# EAGLE board royer_1kw (EAGLE 7.6.0)
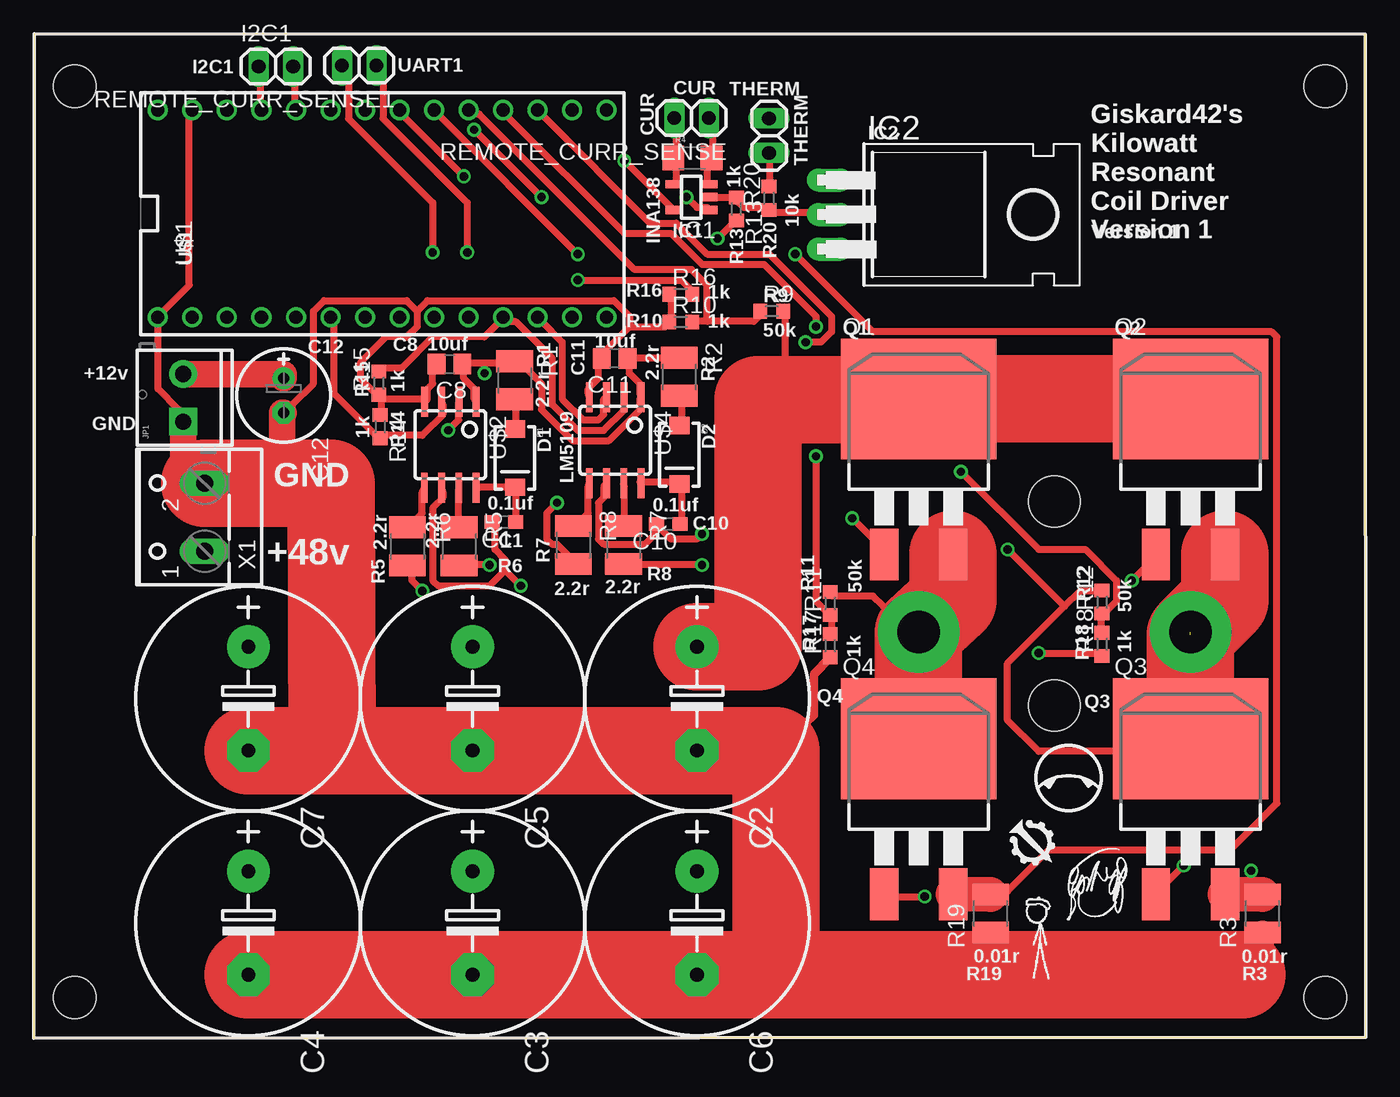
[diagram p0: board, top side]
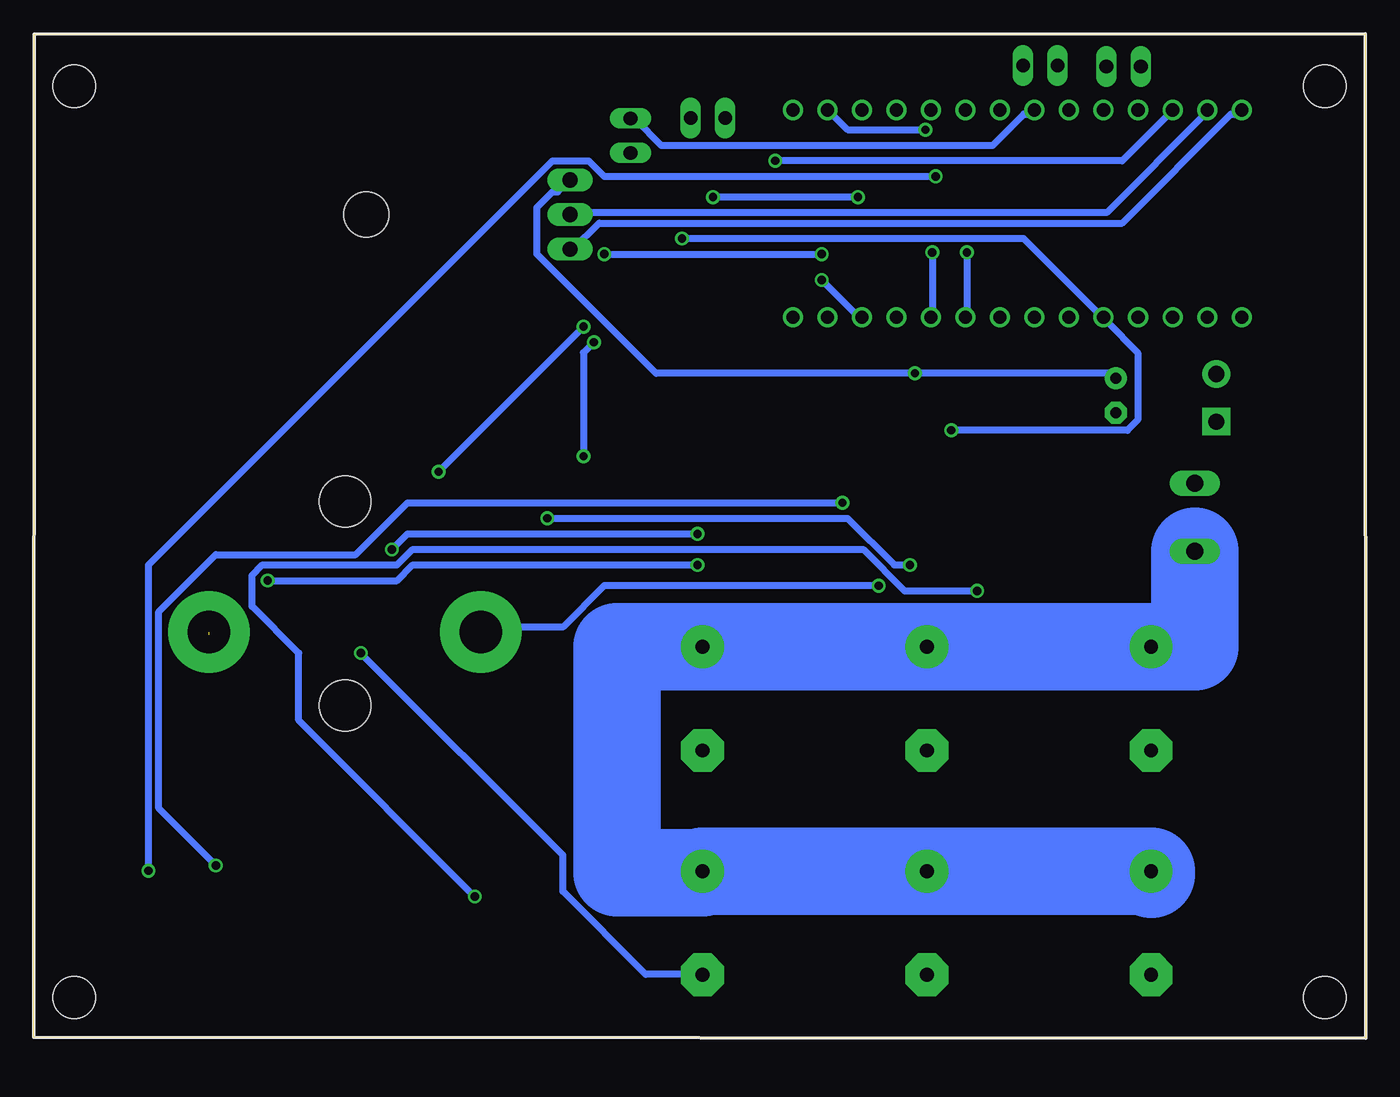
[diagram p1: board, bottom side, seen from below]

Size 97.95 x 73.85 mm. Coordinates in mm from the lower left corner, seen from the top.
Outline: 0,0 97.95,0.07 97.94,73.82 0.01,73.85 0,0
Copper layers (1*16): Top 0.035mm / dielectric 1.5mm / Bottom 0.035mm
Design rules "default *": minimum track width 10mil, minimum drill 24mil, track to track 10mil, track to pad 8mil, pad to pad 8mil, via to via 8mil, smd to smd 8mil, copper to edge 40mil, drill to drill 8mil, minimum pad ring 10mil, minimum via ring 8mil, stop-mask expansion 4mil, vias tented up to drill 0mil, thermal gap 10mil
Net classes: 0 default: width 0.508 mm
Holes 3.78 mm at 75.07,24.47 75.07,39.47
Holes 3.11 mm at 2.99,3.01 2.99,70.01 94.99,70.01 94.99,3.01

## Footprints (pad centres in the part's own frame; a part is rotated, then mirrored left to right if it is on the bottom)
C0603 = smd 1.1 x 1: 1 -0.85,0; 2 0.85,0
E7,5-16 = drill 1.016 pad 3.15: + -3.81,0 | drill 1.016 pad 3.15 octagon: - 3.81,0
C0805 = smd 1.3 x 1.5: 1 -0.95,0; 2 0.95,0
E2,5-7 = drill 0.813 pad 1.6: + -1.27,0 | drill 0.813 pad 1.6 octagon: - 1.27,0
SMA-DIODE = smd 1.27 x 1.47: A -2.15,0; C 2.15,0
1X02 = drill 1.016 long: 1 -1.27,0; 2 1.27,0
SOT23-5 = smd 0.6 x 1.2: 1 -0.95,-1.306; 2 0,-1.306; 3 0.95,-1.306; 4 0.95,1.306; 5 -0.95,1.306
TO220H = drill 1.118 long: 1 -2.54,-10.16; 2 0,-10.16; 3 2.54,-10.16 | hole 3.302: 0,4.826
SCREWTERMINAL-3.5MM-2 = drill 1.2 pad 2.032 square: 1 0,0 | drill 1.2 pad 2.032: 2 3.5,0
D2PACK = smd 2.083 x 3.81: 1 -2.54,-8.89; 3 2.54,-8.89 | smd 11.43 x 8.89: 2 0,2.54
R1210 = smd 1.6 x 2.7: 1 -1.4,0; 2 1.4,0
R3225 = smd 1.6 x 2.7: 1 -1.4,0; 2 1.4,0
1206 = smd 1.6 x 1.8: 1 -1.4,0; 2 1.4,0
R0603 = smd 1 x 1.1: 1 -0.85,0; 2 0.85,0
TEENSY_3.0-3.2&LC_DIL = drill 0.965: 0 -7.62,13.97; 1 -7.62,11.43; 2 -7.62,8.89; 3 -7.62,6.35; 3.3V 7.62,11.43; 4 -7.62,3.81; 5 -7.62,1.27; 6 -7.62,-1.27; 7 -7.62,-3.81; 8 -7.62,-6.35; 9 -7.62,-8.89; 10 -7.62,-11.43; 11 -7.62,-13.97; 12 -7.62,-16.51; 13 7.62,-16.51; 14/A0 7.62,-13.97; 15/A1 7.62,-11.43; 16/A2 7.62,-8.89; 17/A3 7.62,-6.35; 18/A4 7.62,-3.81; 19/A5 7.62,-1.27; 20/A6 7.62,1.27; 21/A7 7.62,3.81; 22/A8 7.62,6.35; 23/A9 7.62,8.89; AGND 7.62,13.97; GND -7.62,16.51; VIN 7.62,16.51
SOIC8 = smd 0.5 x 2.2: 1 -1.905,-3.154; 2 -0.645,-3.154; 3 0.625,-3.154; 4 1.895,-3.154; 5 1.905,3.154; 6 0.635,3.154; 7 -0.635,3.154; 8 -1.905,3.154
W237-102 = drill 1.245 long: 1 -2.5,-1.27; 2 2.5,-1.27

## Placement (x,y rotation side)
C1  0.1uf  [C0603]  34.56,37.96 180 top
C2  [E7,5-16]  48.77,24.97 270 top
C3  [E7,5-16]  32.27,8.47 270 top
C4  [E7,5-16]  15.77,8.47 270 top
C5  [E7,5-16]  32.27,24.97 270 top
C6  [E7,5-16]  48.77,8.47 270 top
C7  [E7,5-16]  15.77,24.97 270 top
C8  10uf  [C0805]  30.57,49.57 180 top
C10  0.1uf  [C0603]  46.66,37.83 180 top
C11  10uf  [C0805]  42.71,49.99 180 top
C12  [E2,5-7]  18.37,47.27 270 top
D1  [SMA-DIODE]  35.38,42.66 270 top
D2  [SMA-DIODE]  47.48,42.91 270 top
I2C1  UART1  [1X02]  17.79,71.45 0 top
IC1  INA138  [SOT23-5]  48.36,61.86 90 top
IC2  7805T  [TO220H]  68.67,60.57 270 top
JP1  [SCREWTERMINAL-3.5MM-2]  10.98,45.34 90 top
Q1  IRF3704S  [D2PACK]  65.07,44.47 0 top
Q2  IRF3704S  [D2PACK]  85.07,44.47 0 top
Q3  IRF3704S  [D2PACK]  85.07,19.47 0 top
Q4  IRF3704S  [D2PACK]  65.07,19.47 0 top
R1  2.2r  [R1210]  35.36,48.39 270 top
R2  2.2r  [R1210]  47.46,48.64 270 top
R3  0.01r  [R3225]  90.37,9.17 90 top
R4  [1206]  48.43,64.73 0 top
R5  2.2r  [R1210]  31.27,36.17 270 top
R6  2.2r  [R1210]  27.47,36.17 270 top
R7  2.2r  [R1210]  43.37,36.27 270 top
R8  2.2r  [R1210]  39.67,36.27 270 top
R9  50k  [R0603]  54.27,53.47 0 top
R10  1k  [R0603]  47.57,52.67 0 top
R11  50k  [R0603]  58.57,31.97 90 top
R12  50k  [R0603]  78.57,32.07 90 top
R13  1k  [R0603]  51.67,60.97 270 top
R14  1k  [R0603]  25.47,44.97 270 top
R15  1k  [R0603]  25.37,48.17 90 top
R16  1k  [R0603]  47.58,54.72 0 top
R17  1k  [R0603]  58.57,28.87 90 top
R18  1k  [R0603]  78.57,28.97 90 top
R19  0.01r  [R3225]  70.37,9.17 90 top
R20  10k  [R0603]  54.07,61.77 90 top
REMOTE_CURR_SENSE  [1X02]  48.37,67.67 180 top
REMOTE_CURR_SENSE1  UART1  [1X02]  23.92,71.53 180 top
THERMISTOR  [1X02]  54.07,66.37 270 top
U$1  TEENSY_LC_DIL  [TEENSY_3.0-3.2&LC_DIL]  25.62,60.64 90 top
U$2  LM5109  [SOIC8]  30.62,43.65 180 top
U$4  LM5109  [SOIC8]  42.75,43.97 180 top
X1  [W237-102]  11.29,38.32 90 top

## Library data of the parts
C1-C8 C10-C12 R1-R3 R5-R20 = rcl
D1 D2 = SparkFun-DiscreteSemi
I2C1 REMOTE_CURR_SENSE REMOTE_CURR_SENSE1 THERMISTOR = pinhead
IC1 = burr-brown; MF: TEXAS INSTRUMENTS; MPN: INA138NA/250; OC_FARNELL: 1564888; OC_NEWARK: 80K5906
IC2 = linear
JP1 = SparkFun-Connectors; PROD_ID: CONN-08399
Q1-Q4 = transistor-power
R4 = SparkFun-Resistors
U$1 = Teensy_3_and_LC_Series_Boards_v1.4
U$2 U$4 = TheLibrary
X1 = con-wago-500; MPN: 237-102; OC_FARNELL: unknown; OC_NEWARK: 70K9898

## Nets
3V3: IC1.5 U$1.3.3V
5V: IC2.3 U$1.VIN
12V: C8.1 C11.1 C12.+ IC2.1 JP1.2 R1.1 R2.1 U$2.1 U$4.1
48V: C2.+ C3.+ C4.+ C5.+ C6.+ C7.+ Q1.2 Q2.2 R9.2 X1.1
48V_SENSE: R9.1 R10.2 U$1.17/A3
A_HI: R13.2 U$1.3 U$2.2
A_LO: R14.2 U$1.4 U$2.3
A_PHASE: C1.2 Q1.3 Q4.2 R11.2 U$2.6
A_PHASE_CURRENT: Q4.3 R19.2 U$1.18/A4
A_PHASE_V: R11.1 R17.2 U$1.15/A1
B_HI: R15.2 U$1.9 U$4.2
B_LO: R16.2 U$1.10 U$4.3
B_PHASE: C10.2 Q2.3 Q3.2 R12.2 U$4.6
B_PHASE_CURRENT: Q3.3 R3.2 U$1.19/A5
B_PHASE_V: R12.1 R18.2 U$1.16/A2
GND: C2.- C3.- C4.- C5.- C6.- C7.- C8.2 C11.2 C12.- IC1.2 IC2.2 JP1.1 R3.1 R10.1 R13.1 R14.1 R15.1 R16.1 R17.1 R18.1 R19.1 R20.1 U$1.AGND U$1.GND U$2.4 U$4.4 X1.2
N$1: R7.1 U$4.7
N$2: R8.1 U$4.5
N$3: Q1.1 R5.2
N$4: Q4.1 R6.2
N$5: D1.A R1.2
N$6: C1.1 D1.C U$2.8
N$7: IC1.3 R4.2 REMOTE_CURR_SENSE.1
N$8: Q2.1 R7.2
N$9: Q3.1 R8.2
N$10: D2.A R2.2
N$11: C10.1 D2.C U$4.8
N$12: IC1.4 R4.1 REMOTE_CURR_SENSE.2
N$13: R20.2 THERMISTOR.2
N$15: R5.1 U$2.7
N$16: R6.1 U$2.5
N$17: REMOTE_CURR_SENSE1.1 U$1.8
N$18: REMOTE_CURR_SENSE1.2 U$1.7
N$19: I2C1.1 U$1.23/A9
N$20: I2C1.2 U$1.22/A8
REMOTE_CURR_SENSE: IC1.1 U$1.14/A0
THERM: THERMISTOR.1 U$1.20/A6

## Tracks (layer width: path | path; a pad name or v marks a point on that pad's centre or on a via)
3V3  (via drill 0.61)
  Top 0.508: v43.43,64.52 46.85,61.09 IC1.5
  Bottom 0.508: v43.43,64.52 17.9,64.52 14.47,67.95 U$1.3.3V
5V
  Bottom 0.508: U$1.VIN 9.14,67.95 9.9,67.95 17.9,59.95 56.38,59.95 58.28,58.04 IC2.3
12V  (via drill 0.61)
  Top 0.508: R2.1 47.24,50.04 43.81,50.04 C11.1 43.81,49.66 43.81,48.9 44.57,48.14 44.57,47.37 U$4.1 44.57,46.99 44.57,46.23 42.28,43.95 39.62,43.95 37.33,46.23 37.33,48.14 35.42,50.04 R1.1 35.04,49.66 33.14,49.66 | U$2.1 32.38,46.99 32.38,47.76 31.61,48.52 31.61,49.28 C8.1 31.61,49.66 33.14,49.66 | v33.14,48.9 33.14,49.66
  Top 1.93: JP1.2 18.37,48.84 C12.+
  Bottom 0.508: IC2.1 58.67,63 59.43,62.23 59.81,62.23 60.95,61.09 60.95,57.66 52.19,48.9 v33.14,48.9 18.66,48.9 C12.+
48V
  Top 0.508: R9.2 55.24,53.09 55.24,46.97
  Top 6.452: C2.+ 53.27,28.78 53.27,46.97 55.24,46.97 65.03,46.97 Q1.2 Q2.2
  Bottom 6.452: 15.77,12.07 C4.+ C3.+ C6.+ 48.77,12.17 55.07,12.17 55.07,28.78 C2.+ C5.+ C7.+ 12.56,28.78 X1.1
48V_SENSE
  Top 0.508: 49.52,52.71 52.95,52.71 53.33,53.09 R9.1 | 49.52,52.71 48.76,52.71 R10.2 | 49.52,52.71 49.52,55.38 48.38,56.52 44.19,56.52 32.76,67.95 32,67.95 U$1.17/A3
A_HI  (via drill 0.61)
  Top 0.508: v50.28,58.8 51.43,59.95 R13.2 | v30.47,44.71 31.23,45.47 31.23,46.61 U$2.2
  Bottom 0.508: v50.28,58.8 25.14,58.8 19.42,53.09 U$1.3 19.04,52.71 16.76,50.42 16.76,45.47 17.52,44.71 v30.47,44.71
A_LO
  Top 0.508: U$2.3 30.09,46.61 30.09,45.85 28.57,44.33 25.52,44.33 R14.2 25.14,44.33 22.09,47.37 22.09,52.71 U$1.4
A_PHASE  (via drill 0.61, 3.11 pad 6)
  Top 0.508: R11.2 58.67,32.52 61.71,32.52 62.48,31.75 v65.07,29.87 | 34.66,34.42 34.66,35.18 33.9,35.94 33.9,37.85 C1.2 | 34.66,34.42 33.52,33.28 29.71,33.28 29.33,33.66 29.33,38.99 30.09,39.75 30.09,40.14 U$2.6 | 34.66,34.42 v35.81,33.28
  Top 6.452: Q1.3 67.61,32.21 v65.07,29.87 Q4.2
  Bottom 0.508: v35.81,33.28 56,33.28 59.05,30.23 64.76,30.23 v65.07,29.87
A_PHASE_CURRENT  (via drill 0.61)
  Top 0.508: v40,57.66 29.71,67.95 U$1.18/A4 | v56,57.66 61.71,51.95 91.05,51.95 91.43,51.57 91.43,17.28 88,13.85 74.67,13.85 71.62,10.8 R19.2
  Top 2.54: Q4.3 R19.2
  Bottom 0.508: v56,57.66 v40,57.66
A_PHASE_V  (via drill 0.61)
  Top 0.508: R17.2 58.67,29.85 58.67,30.99 R11.1 58.28,31.37 57.52,32.13 v57.52,42.8 | v56.76,51.18 57.9,51.18 58.67,51.95 58.67,53.09 54.09,57.66 49.52,57.66 47.24,59.95 45.33,59.95 37.33,67.95 U$1.15/A1
  Bottom 0.508: v57.52,42.8 57.52,50.42 v56.76,51.18
B_HI
  Top 0.508: R15.2 25.52,49.28 27.04,49.28 29.33,51.57 33.14,51.57 34.28,52.71 U$1.9 34.66,52.71 35.42,52.71 38.09,50.04 38.09,46.61 40,44.71 41.9,44.71 43.43,46.23 43.43,46.99 U$4.2
B_LO  (via drill 0.61)
  Top 0.508: v40,55.76 47.62,55.76 48.38,54.99 R16.2 | U$4.3 41.9,46.99 41.9,45.85 41.52,45.47 40.38,45.47 38.85,46.99 38.85,51.18 37.33,52.71 U$1.10
  Bottom 0.508: v40,55.76 37.33,53.09 U$1.10
B_PHASE  (via drill 0.61, 3.11 pad 6)  (1 unrouted)
  Top 0.508: U$4.6 41.9,40.52 41.9,39.75 41.52,39.37 41.52,36.71 41.9,36.33 44.95,36.33 45.71,37.09 45.71,37.47 C10.2 46.09,37.47 46.85,36.71 48.76,36.71 v49.14,37.09 | 75.81,31.75 71.62,27.56 71.62,23.37 73.91,21.09 82.29,21.09 Q3.2 | 75.81,31.75 76.95,32.9 78.48,32.9 R12.2 | 75.81,31.75 v71.62,35.94
  Top 6.452: Q2.3 87.61,32.21 85.07,29.67 Q3.2
  Bottom 0.508: v49.14,37.09 70.48,37.09 v71.62,35.94
  other vias: 85.07,29.87
B_PHASE_CURRENT  (via drill 0.61)
  Top 0.508: v31.61,63.38 27.04,67.95 U$1.19/A5 | v89.53,12.32 89.53,10.58
  Top 2.54: Q3.3 89.53,10.58 R3.2
  Bottom 0.508: v31.61,63.38 56,63.38 57.14,64.52 59.81,64.52 89.53,34.8 v89.53,12.32
B_PHASE_V  (via drill 0.61)
  Top 0.508: R18.2 78.48,29.85 78.48,30.99 R12.1 78.86,31.37 79.62,32.13 79.62,33.66 77.33,35.94 73.91,35.94 v68.19,41.66 | v57.52,52.33 57.52,53.09 53.71,56.9 49.14,56.9 46.85,59.19 43.43,59.19 34.66,67.95 U$1.16/A2
  Bottom 0.508: v57.52,52.33 v68.19,41.66
GND  (via drill 0.61)
  Top 0.508: R16.1 46.85,54.61 46.85,52.71 R10.1 46.47,52.33 43.81,52.33 | U$4.4 40.76,47.37 40.76,47.76 41.52,48.52 41.52,49.66 C11.2 41.52,50.04 43.81,52.33 | IC1.2 49.9,61.85 51.43,61.85 R13.1 51.81,61.47 52.19,61.09 53.71,61.09 R20.1 54.09,60.71 58.28,60.71 IC2.2 | 25.52,46.99 25.52,45.85 R14.1 | C8.2 29.33,49.28 29.33,48.14 28.95,47.76 28.95,46.99 U$2.4 28.57,46.99 25.52,46.99 | 25.52,46.99 R15.1 25.14,47.37 23.99,48.52 23.99,49.66 25.9,51.57 27.42,51.57 28.19,52.33 28.19,53.47 | v73.91,28.32 78.48,28.32 R18.1 | R19.1 70.48,7.75 70.48,4.67 | R3.1 90.29,7.75 85.11,4.55 | JP1.1 10.66,46.23 9.14,47.76 9.14,52.71 U$1.GND 9.14,53.09 11.42,55.38 11.42,67.95 U$1.AGND | 28.19,53.47 27.42,54.23 21.33,54.23 20.57,53.47 20.57,48.14 19.04,46.61 C12.- | 43.81,52.33 43.81,53.09 42.66,54.23 28.95,54.23 28.19,53.47
  Top 0.61: R17.1 58.57,27.97 57.37,26.77 57.37,23.77 56.87,23.27 54.57,21.16
  Top 1.778: 88.86,4.67 90.37,4.67 R3.1
  Top 1.93: JP1.1 10.97,45.34 10.97,40.87 12.56,40.87 X1.2 | C12.- 18.27,46 18.27,40.82
  Top 6.452: C7.- 21.91,21.16 | 21.91,21.16 C5.- C2.- 54.57,21.16 54.57,4.67 | 54.57,4.67 C6.- C3.- C4.- | X1.2 18.27,40.82 21.87,40.82 21.91,21.16 | 54.57,4.67 70.48,4.67 88.86,4.67
  Bottom 0.508: v73.91,28.32 59.05,13.47 59.05,10.8 52.95,4.7 49.14,4.7 C6.- | IC2.2 58.28,60.71 19.04,60.71 11.8,67.95 U$1.AGND
N$1
  Top 0.508: U$4.7 43.43,40.52 43.43,37.85 R7.1
N$2
  Top 0.508: U$4.5 40.76,40.52 40.76,38.61 40,37.85 R8.1
N$3  (via drill 0.61)
  Top 0.508: v33.52,34.8 31.61,34.8 R5.2 | v60.19,38.23 62.48,35.94 Q1.1
  Bottom 0.508: v33.52,34.8 34.66,34.8 38.09,38.23 v60.19,38.23
N$4  (via drill 0.61)
  Top 0.508: v28.57,32.9 27.8,33.66 27.8,34.42 R6.2 | v65.52,10.42 62.86,10.42 Q4.1
  Bottom 0.508: v28.57,32.9 33.9,32.9 36.95,35.94 70.1,35.94 71.24,34.8 81.14,34.8 81.91,34.04 81.91,31.75 78.48,28.32 78.48,23.37 v65.52,10.42
N$5
  Top 0.508: D1.A 35.42,45.09 35.42,46.61 R1.2
N$6
  Top 0.508: C1.1 35.42,38.23 35.42,40.14 D1.C 35.04,40.52 32.76,40.52 U$2.8
N$7
  Top 0.508: IC1.3 49.52,63 49.52,64.52 R4.2 49.9,64.9 49.9,67.57 REMOTE_CURR_SENSE.1
N$8  (via drill 0.61)
  Top 0.508: v49.14,34.8 43.43,34.8 R7.2 | v80.76,33.66 82.67,35.56 Q2.1
  Bottom 0.508: v49.14,34.8 70.1,34.8 71.24,33.66 v80.76,33.66
N$9  (via drill 0.61)
  Top 0.508: v38.47,39.37 37.71,38.61 37.71,36.71 38.09,36.33 38.47,36.33 39.62,35.18 R8.2 | v84.57,12.7 82.67,10.8 Q3.1
  Bottom 0.508: v38.47,39.37 70.48,39.37 74.29,35.56 84.57,35.56 88.76,31.37 88.76,16.89 v84.57,12.7
N$10
  Top 0.508: D2.A 47.62,45.09 47.62,46.99 R2.2
N$11
  Top 0.508: C10.1 47.62,37.85 47.62,40.52 D2.C 47.24,40.9 44.57,40.9 U$4.8
N$12
  Top 0.508: IC1.4 47.24,63 47.24,64.52 R4.1 47.24,64.9 47.24,67.57 REMOTE_CURR_SENSE.2
N$13
  Top 0.508: R20.2 54.09,63 54.09,64.9 THERMISTOR.2
N$15
  Top 0.508: U$2.7 31.23,40.14 31.23,37.85 R5.1
N$16
  Top 0.508: U$2.5 28.57,40.14 28.57,38.61 27.8,37.85 R6.1
N$17  (via drill 0.61)
  Top 0.508: v31.87,57.79 31.87,61.44 25.68,67.63 25.68,70.96 25.2,71.44 REMOTE_CURR_SENSE1.1
  Bottom 0.508: v31.87,57.79 31.87,53.03 U$1.8
N$18  (via drill 0.61)
  Top 0.508: v29.33,57.79 29.33,61.44 23.14,67.63 23.14,70.96 22.66,71.44 REMOTE_CURR_SENSE1.2
  Bottom 0.508: v29.33,57.79 29.33,53.03 U$1.7
N$19
  Top 0.508: U$1.23/A9 16.63,68.27 16.63,71.44 I2C1.1
N$20
  Top 0.508: U$1.22/A8 19.17,68.27 19.17,71.44 I2C1.2
REMOTE_CURR_SENSE  (via drill 0.61)
  Top 0.508: v48,61.85 48.76,61.09 49.52,61.09 IC1.1 | v32.38,66.81 v37.33,61.85
  Bottom 0.508: v37.33,61.85 v48,61.85 | v32.38,66.81 38.09,66.81 39.23,67.95 U$1.14/A0
THERM
  Bottom 0.508: U$1.20/A6 24.38,67.95 25.14,67.95 27.42,65.66 51.81,65.66 53.71,67.57 THERMISTOR.1

## Text on the board
tPlace: Giskard42's / Kilowatt / Resonant / Coil Driver | Version 1
tNames: CUR | THERM
_tsilk: UART1 | I2C1 | THERM | CUR | IC2 | 1k | INA138 | Giskard42's / Kilowatt / Resonant / Coil Driver | IC1 | R13 | 10k | Version 1 | U$1 | R20 | R16 | 1k | R9 | C8 | 10uf | R10 | 10uf | 1k | 50k | Q1 | Q2 | R1 | C11 | 2.2r | C12 | R2 | 2.2r | +12v | 1k | R15 | 1k | R14 | LM5109 | GND | D1 | D2 | GND | 0.1uf | 0.1uf | 2.2r | 2.2r | C10 | C1 | +48v | R5 | R7 | R6 | R8 | 2.2r | 2.2r | R11 | 50k | R12 | 50k | R17 | 1k | R18 | 1k | Q4 | Q3 | 0.01r | 0.01r | R19 | R3